# EAGLE board horiz_med_switch (EAGLE 7.6.0)
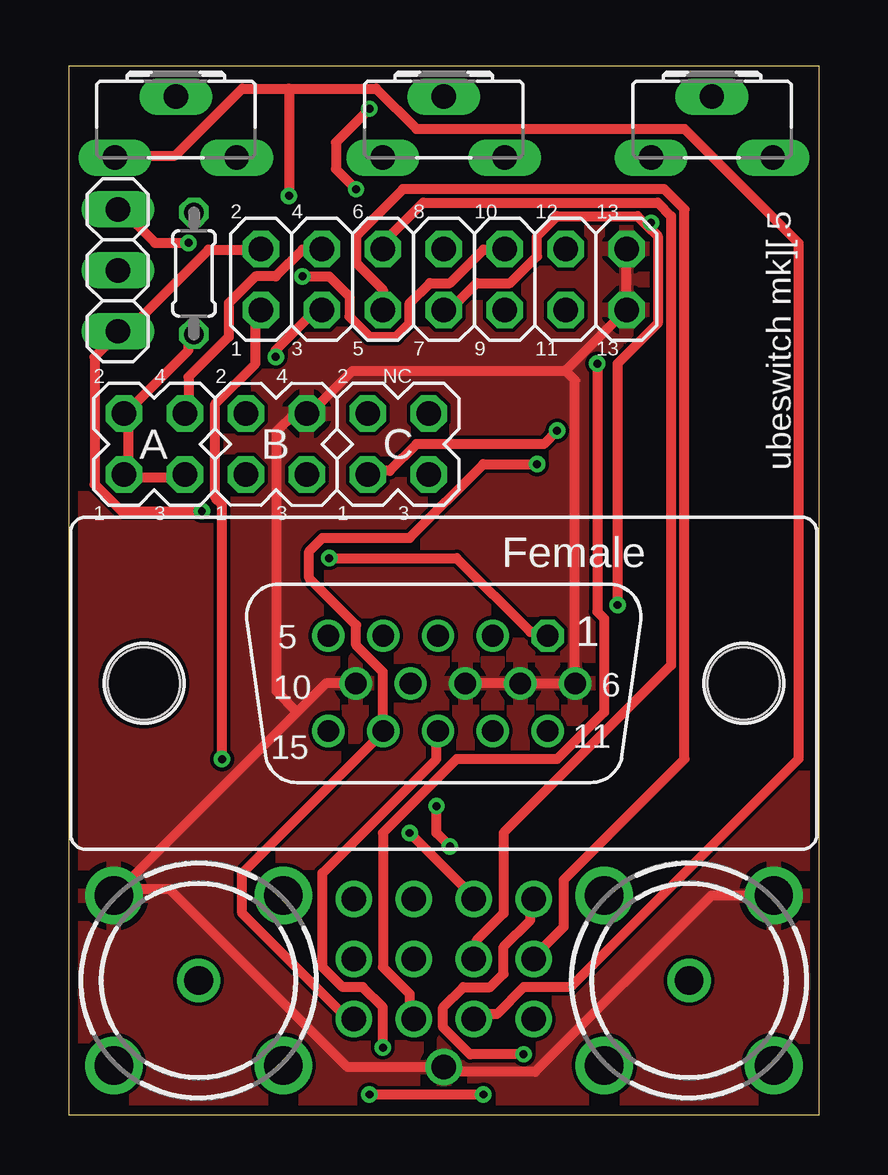
[diagram p0: board, top side]
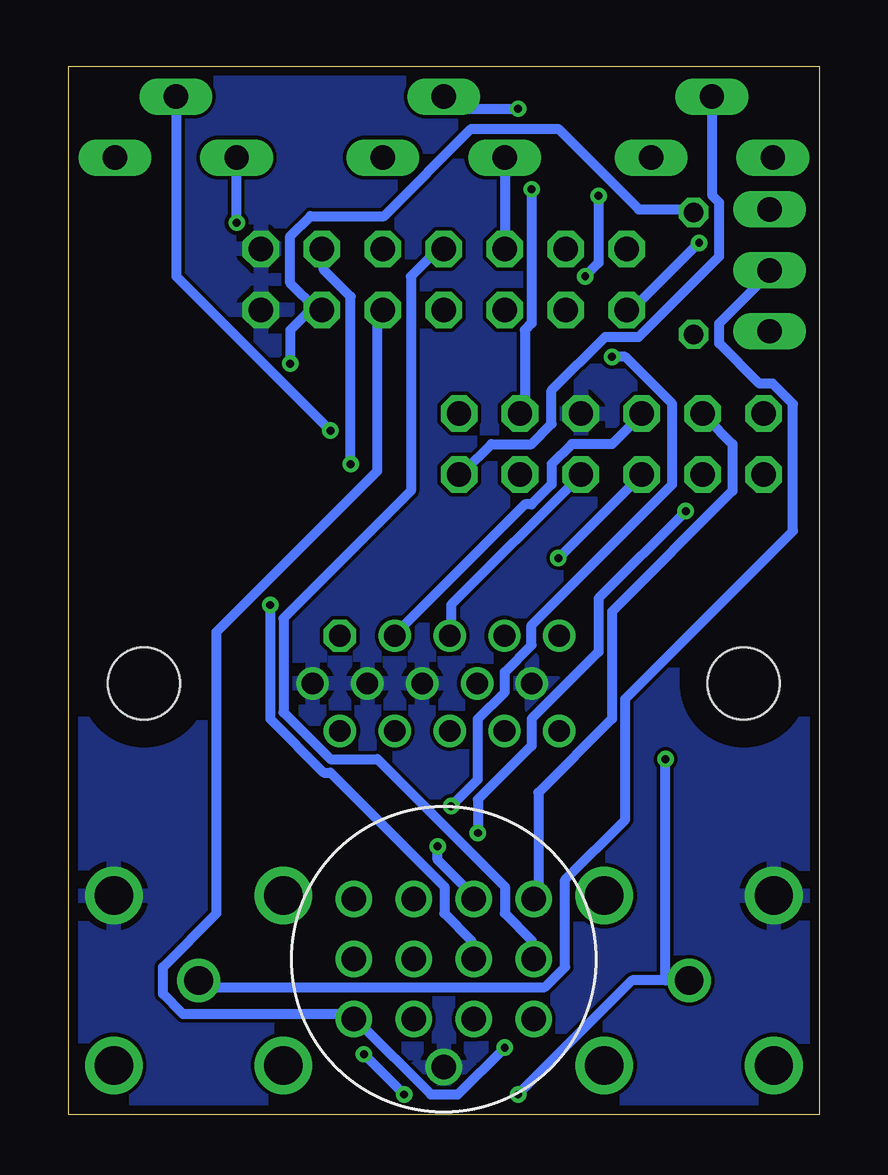
[diagram p1: board, bottom side, seen from below]

Size 31.29 x 43.68 mm. Coordinates in mm from the lower left corner, seen from the top.
Outline: 0,0 31.29,0 31.29,43.68 0,43.68 0,0
Copper layers (1*16): Top 0.0356mm / dielectric 1.5011mm / Bottom 0.0356mm
Design rules "PCBs_io": minimum track width 6mil, minimum drill 13mil, track to track 6mil, track to pad 6mil, pad to pad 6mil, via to via 6mil, smd to smd 6mil, copper to edge 15mil, drill to drill 6mil, minimum pad ring 7mil, minimum via ring 7mil, stop-mask expansion 3mil, vias tented up to drill 0mil, thermal gap 10mil
Net classes: 0 default: width 0.406 mm

## Footprints (pad centres in the part's own frame; a part is rotated, then mirrored left to right if it is on the bottom)
ADADS = drill 1.016: 1 -3.75,2.5; 2 -1.25,2.5; 3 1.25,2.5; 4 3.75,2.5; 5 -3.75,0; 6 -1.25,0; 7 1.25,0; 8 3.75,0; 9 -3.75,-2.5; 10 -1.25,-2.5; 11 1.25,-2.5; 12 3.75,-2.5; 13 0,-4.5
2X07 = drill 1.016 octagon: 1 -7.62,-1.27; 2 -7.62,1.27; 3 -5.08,-1.27; 4 -5.08,1.27; 5 -2.54,-1.27; 6 -2.54,1.27; 7 0,-1.27; 8 0,1.27; 9 2.54,-1.27; 10 2.54,1.27; 11 5.08,-1.27; 12 5.08,1.27; 13 7.62,-1.27; 14 7.62,1.27
1X03 = drill 1.016 long: 1 -2.54,0; 2 0,0; 3 2.54,0
2X06 = drill 1.016 octagon: 1 -6.35,-1.27; 2 -6.35,1.27; 3 -3.81,-1.27; 4 -3.81,1.27; 5 -1.27,-1.27; 6 -1.27,1.27; 7 1.27,-1.27; 8 1.27,1.27; 9 3.81,-1.27; 10 3.81,1.27; 11 6.35,-1.27; 12 6.35,1.27
CA6H = drill 1.016 long: A -2.54,0; E 2.54,0; S 0,2.54
0204/5 = drill 0.813 octagon: 1 -2.54,0; 2 2.54,0
HDF15V = drill 0.9 octagon: 1 4.329,1.98 | drill 0.9: 2 2.043,1.98; 3 -0.243,1.98; 4 -2.529,1.98; 5 -4.815,1.98; 6 5.472,0; 7 3.186,0; 8 0.9,0; 9 -1.386,0; 10 -3.672,0; 11 4.329,-1.98; 12 2.043,-1.98; 13 -0.243,-1.98; 14 -2.529,-1.98; 15 -4.815,-1.98 | hole 3: -12.5,0; 12.5,0
BTOR1 = drill 1.6 pad 2.2: S -5,0; S@1 0,5; S@2 5,0; S@3 0,-5 | drill 1.2 pad 1.6: T 0,0

## Placement (x,y rotation side)
J1  DIN13T  [ADADS]  15.65,6.48 0 bottom
JP1  [2X07]  15.65,34.8 0 top
JP2  [1X03]  2.06,35.18 90 top
JP3  [2X06]  8.66,27.94 0 top
R1  100R  [CA6H]  26.82,39.88 0 top
R2  100R  [CA6H]  15.65,39.88 0 top
R3  100R  [CA6H]  4.47,39.88 0 top
R4  100R  [0204/5]  5.23,35.05 90 top
X1  [HDF15V]  15.65,17.97 0 top
X2  BTOR1  [BTOR1]  25.87,5.59 225 top
X3  BTOR1  [BTOR1]  5.42,5.59 315 top

## Library data of the parts
J1 = ube
JP1 JP2 = pinhead
JP3 = ubepin
R1-R3 = pot
R4 = resistor
X1 = con-subd; OC_FARNELL: unknown; OC_NEWARK: unknown
X2 X3 = con-lumberg; OC_FARNELL: 1217030; OC_NEWARK: unknown

## Nets
8: J1.8 JP1.8
ABLUE: J1.10 JP1.10 R3.A
AGREEN: J1.6 JP1.6 R2.A
AMONO: JP3.1 JP3.2 JP3.3 R4.1
ARED: J1.7 JP1.7 R1.A
AUDIO: J1.1 JP1.1 JP2.3 X3.T
GND: J1.13 JP1.13 JP1.14 JP3.8 X1.6 X1.7 X1.8 X1.10 X2.S X3.S
HS: J1.9 JP1.9 X1.13
MD: J1.4 JP1.4 JP3.4
N$1: J1.11 JP1.11 R4.2
N$2: JP3.9 R1.S
N$4: JP3.10 R2.S
N$5: JP2.2 X2.T
N$6: JP3.11 R3.S
N$7: J1.3 JP1.3
N$8: J1.5 JP1.5
VBLUE: JP3.7 X1.3
VGREEN: JP3.6 X1.2
VIDEO: J1.2 JP1.2 JP2.1
VRED: JP3.5 X1.1
VS: J1.12 JP1.12 X1.14

## Tracks (layer width: path | path; a pad name or v marks a point on that pad's centre or on a via)
8
  Bottom 0.406: J1.8 11.99,6.71 11.99,7.26 13.11,8.38 13.11,9.5 18.42,14.81 20.37,14.81 22.33,16.76 22.33,20.68 17.02,25.98 17.02,34.93 15.9,36.04 JP1.8
ABLUE  (via drill 0.33)
  Top 0.406: 9.19,42.75 7.24,42.75 4.45,39.95 1.93,39.95 R3.A | 9.19,42.75 12.83,42.75 14.5,41.07 25.68,41.07 30.43,36.32 30.43,14.81 20.93,5.31 18.97,5.31 17.86,4.19 17.02,4.19 J1.10 | v9.75,34.93 10.87,34.93 11.71,34.09 11.71,33.25 12.55,32.41 13.67,32.41 14.22,32.97 14.22,33.81 15.06,34.65 15.9,34.65 17.3,36.04 18.14,36.04 JP1.10 | 9.19,42.75 v9.19,38.28
  Bottom 0.406: v9.75,34.93 9.19,35.48 v9.19,38.28
AGREEN
  Top 0.406: J1.6 17.02,6.71 17.02,7.26 18.14,8.38 18.14,11.74 25.12,18.72 25.12,37.44 24.56,38 14.78,38 13.11,36.32 JP1.6
  Bottom 0.406: R2.A JP1.6
AMONO
  Top 0.406: JP3.3 4.72,26.54 2.49,26.54 JP3.1 2.49,26.82 2.49,29.06 JP3.2 2.49,29.34 5,31.85 5,32.41 R4.1
ARED  (via drill 0.33)
  Top 0.406: v22.89,21.23 22.89,31.29 24.56,32.97 24.56,36.6 24.14,37.02 | 24.14,37.02 23.72,37.44 20.37,37.44 19.53,36.6 19.53,35.76 18.42,34.65 17.02,34.65 15.9,33.53 JP1.7 | v24.28,37.16 24.14,37.02
  Bottom 0.406: v22.89,21.23 22.89,16.48 20.65,14.25 20.37,14.25 15.62,9.5 15.62,8.38 14.5,7.26 14.5,6.71 J1.7 | v24.28,37.16 R1.A
AUDIO  (via drill 0.33)
  Top 0.406: v5,36.32 3.61,36.32 2.21,37.72 JP2.3 | v18.97,2.52 16.74,2.52 15.62,3.63 15.62,4.47 16.46,5.31 17.58,5.31 18.14,5.87 18.14,6.99 19.25,8.1 19.25,8.94 J1.1 | v12.55,0.84 v17.3,0.84 | v6.4,14.81 6.4,25.43 6.12,25.71 6.12,29.62 7.8,31.29 7.8,33.53 JP1.1
  Bottom 0.406: v5,36.32 7.8,33.53 JP1.1 | v17.3,0.84 v18.97,2.52 | v12.55,0.84 7.8,5.59 6.4,5.59 | X3.T 6.4,5.59 | 6.4,5.59 v6.4,14.81
GND
  Top 0.406: X1.10 10.73,17.97 9.54,16.77 | 9.54,16.77 X3.S 2.16,9.4 4.22,9.4 11.64,1.98 J1.13 15.85,1.78 19.46,1.78 26.8,9.12 X2.S | 9.54,16.77 8.66,17.65 8.66,28.45 9.42,29.21 JP3.8 10.06,29.21 11.84,30.99 20.73,30.99 | 20.73,30.99 JP1.13 JP1.14 | 20.73,30.99 21.12,30.6 X1.6 X1.7 X1.8
  pour Bottom: 0.41,43.69 30.89,43.69 30.89,0.51 0.41,0.51
  pour Top: 0.41,43.69 30.89,43.69 30.89,0.51 0.41,0.51
HS  (via drill 0.33)
  Top 0.406: v13.11,2.79 13.11,4.47 12.27,5.31 11.43,5.31 10.59,6.15 10.59,10.06 15.34,14.81 15.34,15.93 X1.13
  Bottom 0.406: v13.11,2.79 15.06,0.84 16.18,0.84 19.25,3.91 J1.9 19.53,4.19 26.52,4.19 27.36,5.03 27.36,6.15 25.12,8.38 25.12,20.12 18.42,26.82 18.42,33.53 JP1.9
MD
  Top 0.406: JP3.4 5,29.34 5,30.73 6.68,32.41 6.68,33.81 7.8,34.93 8.64,34.93 9.75,36.04 10.31,36.04 JP1.4
  Bottom 0.406: J1.4 11.71,9.22 11.71,13.41 8.64,16.48 8.64,20.95 3.61,25.98 3.61,27.94 4.72,29.06 JP3.4
N$1  (via drill 0.33)
  Top 0.406: v22.05,31.29 22.05,20.95 22.33,20.68 22.33,16.76 20.37,14.81 16.18,14.81 13.11,11.74 13.11,6.15 14.22,5.03 14.22,4.19 J1.11
  Bottom 0.406: R4.2 5.28,37.72 7.52,37.72 10.87,41.07 14.5,41.07 18.14,37.44 21.21,37.44 22.05,36.6 22.05,34.65 20.93,33.53 JP1.11 21.21,33.53 22.05,32.69 v22.05,31.29
N$2  (via drill 0.33)
  Top 0.406: v20.37,28.5 19.81,27.94 14.5,27.94 13.39,26.82 12.55,26.82 JP3.9
  Bottom 0.406: v20.37,28.5 26.8,34.93 26.8,42.19 R1.S
N$4  (via drill 0.33)
  Top 0.406: v11.99,38.56 11.15,39.4 11.15,40.51 v12.55,41.91
  Bottom 0.406: v11.99,38.56 11.99,32.97 12.27,32.69 12.27,29.34 JP3.10 | v12.55,41.91 15.34,41.91 15.62,42.19 R2.S
N$5
  Bottom 0.406: JP2.2 2.21,34.93 4.17,32.97 4.17,32.13 2.49,30.46 1.93,30.46 1.09,29.62 1.09,24.31 8.08,17.32 8.08,12.29 10.59,9.78 10.59,6.15 11.43,5.31 25.4,5.31 25.68,5.59 X2.T
N$6
  Bottom 0.406: R3.S 4.45,42.19 4.45,38.28 4.17,38 4.17,35.76 7.52,32.41 8.92,32.41 11.15,30.18 11.15,28.78 11.99,27.94 13.67,27.94 14.78,26.82 JP3.11
N$7  (via drill 0.33)
  Top 0.406: v8.64,31.57 8.64,31.85 10.31,33.53 JP1.3 | v15.34,12.85 15.34,11.74 v15.9,11.18
  Bottom 0.406: v8.64,31.57 8.08,31.57 6.12,29.62 6.12,26.26 11.99,20.4 11.99,19.56 13.11,18.44 13.11,17.6 14.22,16.48 14.22,13.97 v15.34,12.85 | v15.9,11.18 15.9,10.62 14.5,9.22 J1.3
N$8
  Top 0.406: JP1.5 13.11,34.37 11.99,35.48 11.99,36.6 13.94,38.56 24.84,38.56 25.68,37.72 25.68,14.81 20.65,9.78 20.65,7.82 19.53,6.71 J1.5
VBLUE
  Bottom 0.406: X1.3 15.34,20.12 15.34,21.23 10.03,26.54 JP3.7
VGREEN
  Bottom 0.406: X1.2 17.58,20.12 12.27,25.43 11.99,25.43 11.15,26.26 11.15,27.1 10.31,27.94 8.64,27.94 7.52,29.06 JP3.6
VIDEO  (via drill 0.33)
  Top 0.406: v14.22,11.74 16.74,9.22 J1.2 | v5.56,25.15 2.21,25.15 1.09,26.26 1.09,31.57 1.93,32.41 JP2.1 2.21,32.41 5.84,36.04 7.8,36.04 JP1.2
  Bottom 0.406: v14.22,11.74 14.22,13.13 11.99,15.37 11.99,16.48 9.19,19.28 9.19,21.51 v5.56,25.15
VRED  (via drill 0.33)
  Top 0.406: v10.87,23.19 16.18,23.19 19.25,20.12 19.81,20.12 X1.1
  Bottom 0.406: JP3.5 v10.87,23.19
VS  (via drill 0.33)
  Top 0.406: J1.12 11.71,3.91 7.24,8.38 7.24,10.06 13.11,15.93 X1.14 13.11,16.2 13.11,18.44 11.99,19.56 11.99,20.4 10.03,22.35 10.03,23.47 10.59,24.03 14.22,24.03 17.3,27.1 v19.53,27.1
  Bottom 0.406: v19.53,27.1 19.53,34.09 20.65,35.2 20.65,36.04 JP1.12

## Text on the board
tPlace: 2 | 4 | 6 | 8 | 10 | 12 | 13 | ubeswitch mk][.5 | 1 | 3 | 5 | 7 | 9 | 11 | 13